# Altium PCB 智能笔 - 主控V2.PCBDOC
Units mil, origin at the board's own origin, x right, y up, seen from the top; angles counter-clockwise.
Board outline 2483.79 x 439.63 mil, 2 copper layers (TopLayer, BottomLayer); 34 components, 52 nets, 138 pads, 78 vias.
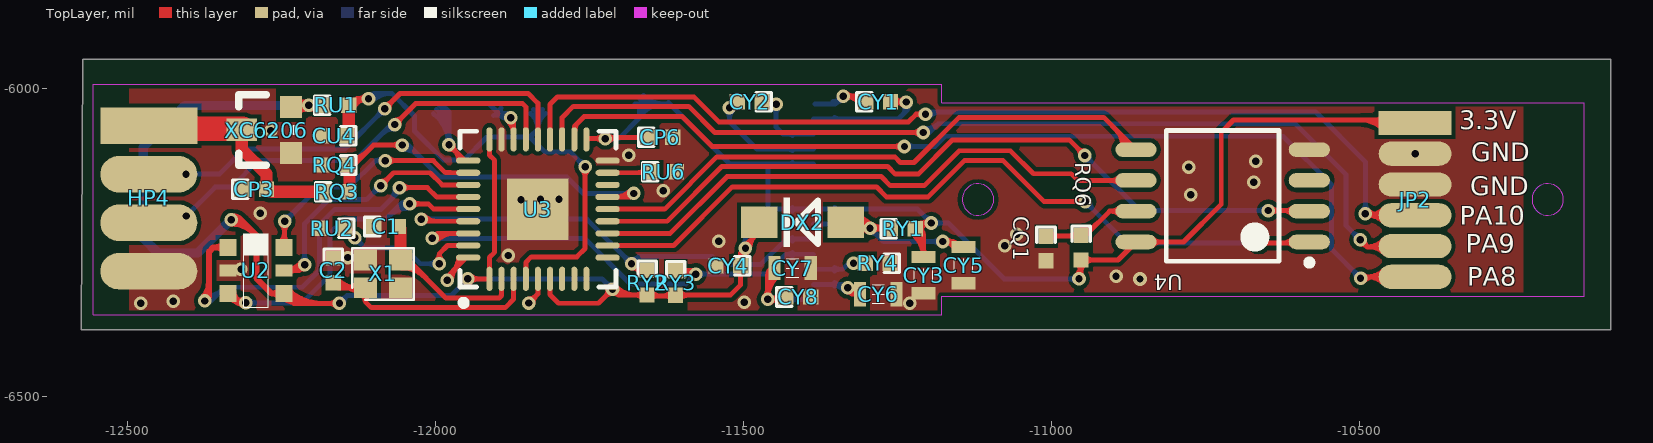
[diagram p0: TopLayer view]
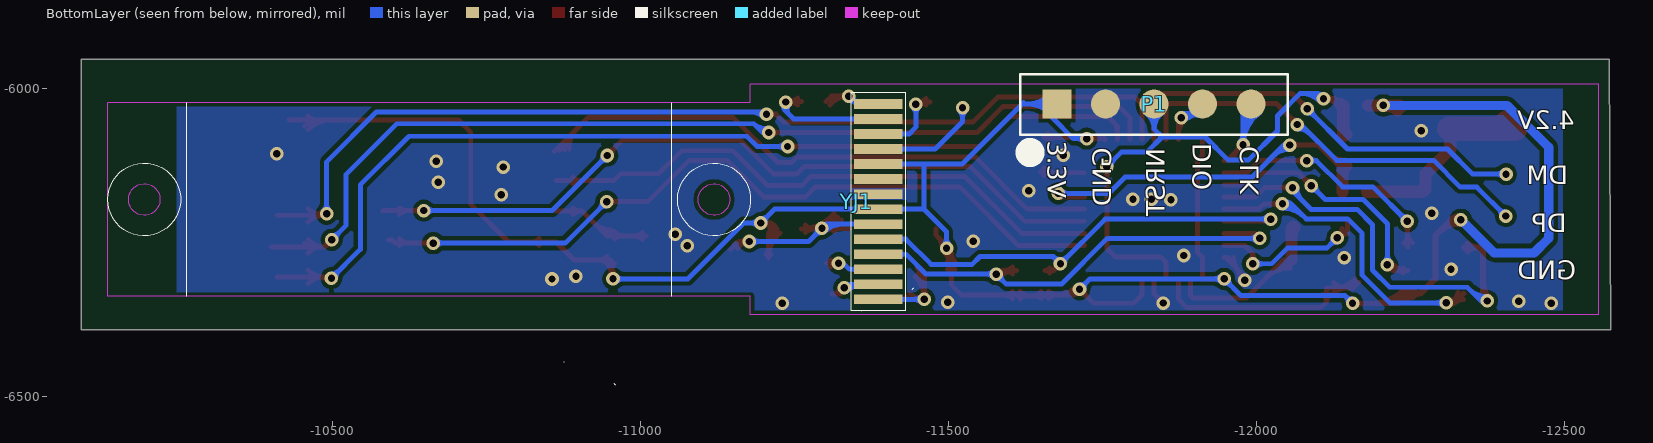
[diagram p1: BottomLayer view, seen from below]

## Layer stack, top to bottom
TopLayer: signal copper 1.4
Dielectric: core 12.6, FR-4, Dk 4.8
BottomLayer: signal copper 1.4

## Board outline
-12573,-5952.24 -10091.44,-5952.24 -10091.44,-6391.87 -12575.23,-6391.87

## Design rules (kind name [scope] priority, off if disabled: settings)
Clearance [All] p1: gap=7
ComponentClearance [All] p1 off: gap=10 collisioncheckmode=3
FanoutControl Fanout_LCC [All] p1 off: bgadir=Out bgaviamode=Centered fanoutstyle=Auto fanoutdirection=Alternating viagrid=1 // Protel DXP Scope 1 Expression Was: IsLCC   Fanout_LCC (Default Rule)
FanoutControl Fanout_BGA [All] p2 off: bgadir=Out bgaviamode=Centered fanoutstyle=Auto fanoutdirection=Alternating viagrid=1 // Protel DXP Scope 1 Expression Was: IsBGA   Fanout_BGA (Default Rule)
FanoutControl Fanout_SOIC [All] p3 off: bgadir=Out bgaviamode=Centered fanoutstyle=Auto fanoutdirection=Alternating viagrid=1 // Protel DXP Scope 1 Expression Was: IsSOIC   Fanout_SOIC (Default Rule)
FanoutControl Fanout_Default [All] p4: bgadir=Out bgaviamode=Centered fanoutstyle=Auto fanoutdirection=Alternating viagrid=1 // Fanout_Default (Default Rule)
FanoutControl Fanout_Small [All] p5 off: bgadir=Out bgaviamode=Centered fanoutstyle=Auto fanoutdirection=Alternating viagrid=1 // Protel DXP Scope 1 Expression Was: (CompPinCount < 5)   Fanout_Small (Default Rule)
PolygonConnect [All] p1: connectstyle=Direct reliefconductorwidth=10 reliefentries=4 polygonreliefangle="90 Angle"
RoutingVias [All] p1: holewidth=28 width=50 viastyle="Through Hole" minholewidth=28 minwidth=50 maxholewidth=28 maxwidth=50
SolderMaskExpansion [All] p1: expansion=4
TestPointUsage [All] p1: valid=0 allowmultiple=FALSE
Testpoint [(IsPad And (OnTopLayer Or OnBottomLayer))] p1: side=3 testpointundercomponent=TRUE minsize=40 maxsize=100 preferedsize=60 minholesize=20 maxholesize=40 preferedholesize=32 testpointgrid=1 style=297 order=-539222988
Width [All] p1: maxlimit=1111 minlimit=1 preferedwidth=10 toplayer_prefwidth=8 bottomlayer_prefwidth=8 minimp=50.000000 maximp=50.000000 favimp=50.000000
12 further rules are at their usual default settings.

## Components (designator, comment, footprint, x,y, rotation, side; value= is the part's Value field where it differs from the comment)
C1 "C_27P" 0402 -12100.01,-6223.82 r0 top
C2 "C_27P" 0402 -12166.21,-6275.06 r270 top
CP3 "105" 0402 -12314.47,-6163.3 r0 top
CP6 "104" 0402 -11654.9,-6079.12 r0 top
CQ1 "104" 0402 -11008.53,-6239.35 r270 top
CU4 "104" 0402 -12144.3,-6076.17 r180 top
CY1 "105" 0402 -11301.01,-6020.93 r0 top
CY2 "105" 0402 -11469.66,-6021.31 r180 top
CY3 "106" 0603-1 -11207.38,-6302.77 r270 top
CY4 "104" 0402 -11504.41,-6287.28 r180 top
CY5 "4.7UF" 0603-1 -11142.38,-6286.52 r90 top
CY6 "2.2UF" 0603-1 -11281.1,-6333.76 r0 top
CY7 "4.7UF" 0603-1 -11420.01,-6291.28 r0 top
CY8 "0.1UF" 0402 -11430.86,-6338.28 r0 top
DX2 "SS14" DIODE_SOP -11334.03,-6216.9 r180 top
HP4 "Header 4" "2.0 4P 焊盘" -12465.61,-6060.23 r0 top
JP2 "Header 6" "1.27MM  6H - 焊接" -10409.21,-6055.6 r270 top
P1 "Header 5" "2.0 1*5P" -11676.19,-6024.94 r180 bottom
RQ3 "10K" 0402 -12179.71,-6167.58 r0 top
RQ4 "10K" 0402 -12143.88,-6123.96 r180 top
RQ6 "10K" 0402 -10951.63,-6238.15 r270 top
RU1 "10K" 0402 -12181.01,-6027.22 r0 top
RU2 "10k" 0402 -12147.54,-6226.63 r180 top
RU6 "10k" 0402 -11648.9,-6134.82 r0 top
RY1 "4.7k" 0402 -11261.12,-6227.67 r0 top
RY2 "4.7k" 0402 -11656.42,-6295.11 r270 top
RY3 "4.7k" 0402 -11610.13,-6295.38 r270 top
RY4 "560k" 0402 -11261.87,-6283.54 r180 top
U2 "中文字库GT20L1616" SOT23-6 -12291.47,-6295.26 r270 top
U3 "STM32F103T8U6 QFN36" QFN36 -11833.63,-6195.62 r90 top
U4 "W25Q128" SST25VF016B -10721.68,-6173.98 r180 top
X1 "16M" "Crystal_SOP 2016" -12113.94,-6323.59 r0 top
XC6206 "XC6206P332MR (662K) 3.3V/0.5A 稳压芯片" SOT23-3-1 -12234.52,-6104.64 r90 top
YJ1 "0.86寸液晶屏" "0.86寸 oled 显示屏" -11386.06,-6183.45 r180 bottom locked

## Footprints (in the part's own frame and the unit in brackets; to place one, negate y for a bottom-side part, rotate by r counter-clockwise, add the part's x,y. Pads: shape width x height; smd on the part's side, far side on the other; paste and mask are expansions set on the pad)
"0.86寸 oled 显示屏" [mm]
  rect 2x0.4 smd: 1(0,4.03) 2(0,3.41) 3(0,2.79) 4(0,2.17) 5(0,1.55) 6(0,0.93) 7(0,0.31) 8(0,-0.31) 9(0,-0.93) 10(0,-1.55) 11(0,-2.17) 12(0,-2.79) 13(0,-3.41) 14(0,-4.03)
  round 1 on Bottom Overlay: 19(-1.774,3.963)
  silkscreen extent -1.12,-4.5 1.12,4.5
"1.27MM  6H - 焊接" [mm]
  rect 1x3 smd: 1(0,0)
  oval 1x3 smd: 2(1.27,0) 3(2.54,0) 4(3.81,0) 5(5.08,0) 6(6.35,0)
"2.0 1*5P" [mm]
  rect 1.2x1.2 smd: 1(0,0)
  round 1.2 smd: 2(2,0) 3(4,0) 4(6,0) 5(8,0)
  silkscreen extent -1.51,-2.1 9.51,1.22
"2.0 4P 焊盘" [mm]
  rect 4x1.5 smd: 1(0,0)
  oval 4x1.5 smd: 2(0,-2) 3(0,-4) 4(0,-6)
0402 [mil]
  rect 25x25 smd: 1(0,0) 2(40,0)
  silkscreen extent -15,-15 10,15
0603-1 [mm] "1.6mm*0.8mm*0.8mm"
  rect 0.5x1 smd: 1(-0.75,0) 2(0.75,0)
  silkscreen extent -0.25,-0.38 0.25,0.38
"Crystal_SOP 2016" [mm]
  rect 0.95x0.85 smd: 0(0,1.15) 0(1.45,0) 1(0,0) 2(1.45,1.15)
  silkscreen extent -0.54,-0.49 2,1.64
DIODE_SOP [mm]
  rect 1.5x1.3 smd: 1(0,0) 2(3.556,0)
  silkscreen extent 1.14,-1.02 2.56,1.02
QFN36 [mm]
  rect 2.54x2.54 smd: 0(0,0)
  oval 1x0.25 smd: 1(-2.875,2) 2(-2.875,1.5) 3(-2.875,1) 4(-2.875,0.5) 5(-2.875,0) 6(-2.875,-0.5) 7(-2.875,-1) 8(-2.875,-1.5) 9(-2.875,-2) 19(2.875,-2) 20(2.875,-1.5) 21(2.875,-1) 22(2.875,-0.5) 23(2.875,0) 24(2.875,0.5) 25(2.875,1) 26(2.875,1.5) 27(2.875,2)
  oval 0.25x1 smd: 10(-2,-2.875) 11(-1.5,-2.875) 12(-1,-2.875) 13(-0.5,-2.875) 14(0,-2.875) 15(0.5,-2.875) 16(1,-2.875) 17(1.5,-2.875) 18(2,-2.875) 28(2,2.875) 29(1.5,2.875) 30(1,2.875) 31(0.5,2.875) 32(0,2.875) 33(-0.5,2.875) 34(-1,2.875) 35(-1.5,2.875) 36(-2,2.875)
  silkscreen extent -3.99,-3.21 3.21,3.21
SOT23-3-1 [mil]
  rect 36x36 smd: 1(75,0) 2(0,0)
  rect 36x50 smd: 3(38,80)
  silkscreen extent -20,-5 95,85
SOT23-6 [mm] "MAX9041,3mm*3mm*1.5mm"
  rect 0.7x0.7 smd: 1(-0.95,-1.15) 3(0.95,-1.15) 4(0.95,1.15) 6(-0.95,1.15)
  rect 0.5x0.7 smd: 2(0,-1.15) 5(0,1.15)
  silkscreen extent -1.52,-0.51 1.52,0.51
SST25VF016B [mm] "SOIC, 8-Leads, Body 5.4x5.4mm (max), Pitch 1.27mm, IPC Medium Density"
  oval 1.7x0.6 smd: 1(-3.575,1.905) 2(-3.575,0.635) 3(-3.575,-0.635) 4(-3.575,-1.905) 5(3.575,-1.905) 6(3.575,-0.635) 7(3.575,0.635) 8(3.575,1.905)
  silkscreen extent -3.7,-2.7 2.33,2.88

## Part data
C1 C2 CP6 CU4 CY3 CY4 CY5 CY6 CY7 CY8: library part Cap, "Capacitor"
CP3 CY1 CY2: library part 104, "Capacitor"
CQ1: "Capacitor"
DX2: library part "Diode 1N4001", "1 Amp General Purpose Rectifier"
HP4: "Header, 4-Pin"
JP2: "Header, 6-Pin"
P1: "Header, 5-Pin"
RQ3 RQ4 RQ6 RU1 RU2 RU6 RY1 RY2 RY3 RY4: library part Res2, "Resistor"
U4: library part SST25VF016B
X1: library part XTAL_1, "Crystal Oscillator"

## Via types
v1: diameter 22, hole 12, TopLayer to BottomLayer, 78 vias

## Nets (pads, with @x,y where several pads share a name; then routed paths per layer and width w, separated by ;. In a path a pad name is that pad's centre, name@x,y a point inside that pad or via, vN(x,y) a via of type N, cw(c..) or ccw(c..) an arc to the next point about the centre after c; other vN are vias at no path point)
3.3V: CP6.1 CY3.1 CY4.1 DX2.2 JP2.1 P1.1 RQ6.2 RU1.1 RY1.2 RY2.2 RY3.2 U2.4 U3.1 U3.6 U3.19 U3.27 U4.8 XC6206.1 YJ1.5 YJ1.8 | length 5881.2
  TopLayer w8: U2.4@-12250.59,-6337.06 ccw(c-12222.62,-6309.1) -12222.62,-6348.65 ; U2.4 -12230.21,-6348.65 ; U2.4@-12245.89,-6342.44 cw(c-12245.22,-6363.66) -12230.21,-6348.65 ; U2.4@-12244.93,-6331.41 ccw(c-12203.31,-6289.78) -12203.31,-6348.65 ; U2.4@-12239.28,-6325.75 ccw(c-12183.99,-6270.47) -12183.99,-6348.65 ; U2.4@-12236.42,-6332.97 ccw(c-12215.2,-6333.64) -12230.21,-6348.65 ; v1@-12160.9,-6353.6 ccw(c-12172.85,-6365.55) -12172.85,-6348.65 ccw(c-12172.85,-6331.75) v1@-12160.9,-6343.7 ; v1(-12155.95,-6348.65) -12230.21,-6348.65 ; v1(-11947.42,-6308.8) U3.1 -11912.37,-6273.72 -11904.02,-6265.37 -11904.02,-6116.4 -11912.37,-6108.05 U3.27 ; v1@-11942.47,-6313.75 cw(c-11930.52,-6325.7) -11930.52,-6308.8 cw(c-11930.52,-6291.9) v1@-11942.47,-6303.85 ; U3.6 -11813.94,-6334.67 -11800.12,-6348.5 -11735.22,-6348.5 v1(-11712.52,-6325.81) -11703.22,-6335.11 ; U3.19 -11753.6,-6081.14 v1(-11724.13,-6081.14) -11722.12,-6079.12 CP6.1 ; U3.19@-11754.24,-6083.08 cw(c-11749.55,-6087.76) -11749.55,-6081.14 ; v1@-11729.08,-6086.09 ccw(c-11741.03,-6098.04) -11741.03,-6081.14 ccw(c-11741.03,-6064.24) v1@-11729.08,-6076.19 ; v1@-11719.52,-6325.81 cw(c-11736.42,-6325.81) -11724.47,-6337.75 cw(c-11712.52,-6349.7) v1@-11712.52,-6332.81 ; v1@-11719.18,-6086.09 cw(c-11702.38,-6102.89) -11702.38,-6079.12 ; v1@-11719.18,-6076.19 ccw(c-11712.09,-6069.09) -11712.09,-6079.12 ; v1@-11713.23,-6326.51 ccw(c-11692.47,-6305.75) -11692.47,-6335.11 ; v1@-11711.19,-6332.68 cw(c-11709.49,-6341.39) -11703.22,-6335.11 ; v1@-11707.57,-6320.86 ccw(c-11673.15,-6286.44) -11673.15,-6335.11 ; v1@-11705.65,-6327.14 ccw(c-11696.94,-6328.84) -11703.22,-6335.11 ; RY2.2@-11662.43,-6341.12 ccw(c-11676.94,-6355.63) -11676.94,-6335.11 ccw(c-11676.94,-6314.59) RY2.2@-11662.43,-6329.1 ; CP6.1@-11660.91,-6085.13 ccw(c-11675.42,-6099.64) -11675.42,-6079.12 ccw(c-11675.42,-6058.6) CP6.1@-11660.91,-6073.11 ; RY2.2@-11650.41,-6341.12 cw(c-11639.77,-6351.76) -11639.77,-6336.72 ; RY2.2@-11650.41,-6329.1 ccw(c-11632.03,-6310.72) -11632.03,-6336.72 ; -11633.88,-6336.72 ccw(c-11633.88,-6311.63) RY3.2@-11616.14,-6329.37 ; -11627.42,-6336.72 cw(c-11627.42,-6352.67) RY3.2@-11616.14,-6341.39 ; RY3.2@-11611.42,-6336.72 -11654.82,-6336.72 RY2.2 -11703.22,-6335.11 ; RY3.2 -11521.16,-6335.38 -11504.41,-6318.63 -11504.41,-6266.93 ; RY3.2@-11604.12,-6341.39 cw(c-11589.61,-6355.9) -11589.61,-6335.38 cw(c-11589.61,-6314.86) RY3.2@-11604.12,-6329.37 ; CY4.1@-11510.42,-6293.29 cw(c-11524.93,-6307.8) -11504.41,-6307.8 cw(c-11483.89,-6307.8) CY4.1@-11498.4,-6293.29 ; CY4.1@-11510.39,-6281.23 ccw(c-11524.51,-6266.93) -11504.41,-6266.93 ; CY4.1@-11504.41,-6294.84 cw(c-11460.93,-6294.84) v1@-11491.68,-6264.1 ; CY4.1@-11504.41,-6275.53 cw(c-11480.24,-6275.53) v1@-11497.33,-6258.44 ; v1@-11503.21,-6261.53 cw(c-11508.06,-6263.28) -11504.41,-6266.93 ; v1@-11499.01,-6265.73 ccw(c-11500.76,-6270.58) -11504.41,-6266.93 ; CY4.1@-11498.44,-6281.23 cw(c-11484.31,-6266.93) -11504.41,-6266.93 ; v1@-11489.63,-6259.15 cw(c-11462.04,-6259.15) DX2.2@-11481.55,-6239.64 ; DX2.2@-11479.33,-6227.45 -11479.33,-6237.43 -11496.63,-6254.72 v1(-11496.63,-6259.15) -11504.41,-6266.93 ; RY1.2@-11226.58,-6234.18 cw(c-11260.95,-6275.27) CY3.1@-11207.38,-6275.27 ; RY1.2@-11221.44,-6228.05 cw(c-11246.62,-6258.15) -11207.38,-6258.15 ; RY1.2@-11220.79,-6236.16 cw(c-11220.08,-6254.11) -11207.38,-6241.41 ; RY1.2@-11220.66,-6227.85 cw(c-11206.43,-6233.44) -11206.43,-6218.16 ; RY1.2@-11216.31,-6221.91 cw(c-11232.3,-6241.02) -11207.38,-6241.02 ; RY1.2@-11213.21,-6230.78 cw(c-11194.69,-6238.06) v1(-11194.69,-6218.16) RY1.2@-11211.61,-6218.16 ; RY1.2@-11212.63,-6228 ccw(c-11194.68,-6228.7) -11207.38,-6241.41 ; CY3.1@-11211.51,-6269.11 ccw(c-11221.48,-6259.14) -11207.38,-6259.14 ccw(c-11193.27,-6259.14) CY3.1@-11203.25,-6269.11 ; CY3.1 -11207.38,-6241.41 ; v1@-11199.64,-6223.11 ccw(c-11211.59,-6235.06) RY1.2@-11211.59,-6218.16 ; v1@-11199.64,-6213.21 cw(c-11211.59,-6201.26) RY1.2@-11211.59,-6218.16 ; v1@-10959.9,-6303.91 ccw(c-10979.85,-6283.96) RQ6.2@-10951.63,-6283.96 ; RQ6.2@-10957.65,-6284.16 cw(c-10972.16,-6298.67) -10951.63,-6298.67 cw(c-10931.11,-6298.67) -10945.62,-6284.16 cw(c-10931.11,-6298.67) -10931.11,-6278.15 cw(c-10931.11,-6257.63) RQ6.2@-10945.62,-6272.14 ; v1(-10954.95,-6308.86) -10951.63,-6305.55 RQ6.2 -10891.6,-6278.15 U4.8 -10785.18,-6248.98 -10724.01,-6187.81 -10724.01,-6070.86 -10704.03,-6050.88 -10429.59,-6050.88 JP2.1@-10429,-6050.29 ; U4.8@-10835.25,-6254.5 cw(c-10821.91,-6267.84) -10821.91,-6248.98 cw(c-10821.91,-6230.12) U4.8@-10835.25,-6243.45 ; -10497.85,-6050.88 cw(c-10497.85,-6104.86) JP2.1@-10459.67,-6066.69 ; -10478.53,-6050.88 cw(c-10478.53,-6085.55) JP2.1@-10454.02,-6061.04 ; -10475.05,-6050.88 ccw(c-10475.05,-6029.13) JP2.1@-10459.67,-6044.51 ; RY1.2@-11211.61,-6218.16 RY1.2 -11207.38,-6241.41
  TopLayer w10: v1@-12333.94,-6209.56 cw(c-12327.06,-6221.48) -12317.33,-6211.75 ; v1@-12331.94,-6219.02 cw(c-12331.94,-6271.86) -12294.58,-6234.5 ; v1(-12331.94,-6213.02) -12316.05,-6213.02 -12290.71,-6238.36 -12290.71,-6307.64 -12265.69,-6332.67 ; v1@-12331.94,-6209.02 cw(c-12331.94,-6237.71) -12311.65,-6217.42 ; v1@-12328.94,-6218.22 cw(c-12320.31,-6233.17) -12308.11,-6220.96 ; v1@-12327.69,-6217.26 cw(c-12317.45,-6227.51) -12317.45,-6213.02 cw(c-12317.45,-6198.54) v1@-12327.69,-6208.78 ; U2.4@-12252.76,-6338.49 ccw(c-12265.69,-6349.93) -12265.69,-6332.67 ; U2.4@-12252.76,-6326.85 cw(c-12265.69,-6315.4) -12265.69,-6332.67 ; U2.4 -12265.69,-6332.67
  TopLayer w20: U2.4 U2.4@-12245.85,-6332.33 ; XC6206.1 -12232.1,-6027.22 RU1.1 ; XC6206.1@-12228.87,-6035.3 cw(c-12209.36,-6054.8) v1@-12209.36,-6027.22
  BottomLayer w8: v1(-12155.95,-6348.65) -12143.42,-6336.12 -11974.74,-6336.12 v1(-11947.42,-6308.8) -11729.52,-6308.8 v1(-11712.52,-6325.81) ; v1@-12155.95,-6341.65 ccw(c-12155.95,-6324.75) -12144,-6336.7 ccw(c-12132.05,-6348.65) v1@-12148.95,-6348.65 ; v1@-11954.42,-6308.8 cw(c-11971.32,-6308.8) -11959.37,-6320.75 cw(c-11947.42,-6332.7) v1@-11947.42,-6315.8 ; v1@-11942.47,-6313.75 cw(c-11930.52,-6325.7) -11930.52,-6308.8 cw(c-11930.52,-6291.9) v1@-11942.47,-6303.85 ; v1(-11724.13,-6081.14) -11702.6,-6081.14 -11668.67,-6047.2 P1.1@-11668.67,-6024.94 ; v1@-11719.52,-6325.81 ccw(c-11736.42,-6325.81) -11724.47,-6313.86 ccw(c-11712.52,-6301.91) v1@-11712.52,-6318.81 ; v1@-11719.18,-6086.09 cw(c-11707.23,-6098.04) -11707.23,-6081.14 cw(c-11707.23,-6064.24) v1@-11719.18,-6076.19 ; P1.1 -11623.78,-6024.94 -11621.6,-6022.75 -11521.93,-6122.42 YJ1.5 ; P1.1@-11667.97,-6033.15 cw(c-11648.13,-6052.99) -11648.13,-6024.94 cw(c-11648.13,-5996.88) P1.1@-11667.97,-6016.72 ; P1.1@-11662.31,-6038.81 cw(c-11628.81,-6072.31) -11628.81,-6024.94 cw(c-11628.81,-5977.56) P1.1@-11662.31,-6011.06 ; v1@-11501.58,-6254.2 ccw(c-11513.53,-6242.25) -11496.63,-6242.25 ccw(c-11479.73,-6242.25) v1@-11491.68,-6254.2 ; v1(-11496.63,-6259.15) -11496.63,-6232.2 -11460.08,-6195.65 ; -11460.2,-6122.42 -11460.08,-6139.83 -11460.08,-6195.65 ; YJ1.8@-11420.29,-6198.39 ccw(c-11426.91,-6205) -11426.91,-6195.65 ccw(c-11426.91,-6186.3) YJ1.8@-11420.29,-6192.91 ; YJ1.5@-11420.29,-6125.16 ccw(c-11426.91,-6131.78) -11426.91,-6122.42 ccw(c-11426.91,-6113.07) YJ1.5@-11420.29,-6119.68 ; YJ1.8@-11351.82,-6198.39 cw(c-11345.21,-6205) -11345.21,-6195.65 cw(c-11345.21,-6186.3) YJ1.8@-11351.82,-6192.91 ; v1@-11201.69,-6218.16 ccw(c-11218.59,-6218.16) -11206.64,-6206.21 ccw(c-11194.69,-6194.26) v1@-11194.69,-6211.16 ; v1@-11189.74,-6223.11 cw(c-11177.79,-6235.06) -11177.79,-6218.16 cw(c-11177.79,-6201.26) v1@-11189.74,-6213.21 ; v1@-10959.9,-6313.81 ccw(c-10971.85,-6325.76) -10971.85,-6308.86 ccw(c-10971.85,-6291.96) v1@-10959.9,-6303.91 ; v1(-10954.95,-6308.86) -11076.69,-6308.86 -11167.39,-6218.16 v1(-11194.69,-6218.16) -11217.2,-6195.65 -11460.08,-6195.65
  BottomLayer w15: v1(-12331.94,-6213.02) -12385.89,-6266.98 -12450.54,-6266.98 -12474.58,-6242.94 -12474.58,-6094.96 -12406.84,-6027.22 v1(-12205.88,-6027.22)
ADC1: U3.7
ADC2: RQ3.2 RQ4.1 U3.15 | length 823.2
  TopLayer w8: RQ4.1 -12132.86,-6123.96 -12100.46,-6091.56 v1(-12053.68,-6091.56) ; RQ4.1@-12143.88,-6123.46 ccw(c-12143.88,-6095.66) -12124.22,-6115.32 ; RQ4.1@-12143.88,-6115.46 ccw(c-12143.88,-6068.35) -12110.56,-6101.66 ; v1@-12058.63,-6096.51 ccw(c-12070.58,-6108.46) -12070.58,-6091.56 ccw(c-12070.58,-6074.66) v1@-12058.63,-6086.61 ; U3.15 -11683.89,-6175.93 v1(-11678.12,-6170.16) v1@-11678.9,-6175.93 ; U3.15@-11708.95,-6175.93 ccw(c-11708.95,-6139.34) v1@-11683.07,-6165.21 ; -11689.64,-6175.93 ccw(c-11689.64,-6158.65) v1@-11677.42,-6170.87
  TopLayer w20: RQ4.1@-12145.64,-6125.73 cw(c-12159.97,-6140.05) -12139.71,-6140.05 ; RQ4.1 -12139.71,-6128.13 RQ3.2
  BottomLayer w8: v1@-12053.68,-6098.56 cw(c-12053.68,-6137.17) -12026.38,-6109.87 ; v1(-12053.68,-6091.56) -12044.69,-6091.56 -11992.59,-6143.65 -11786.44,-6143.65 -11759.93,-6170.16 v1(-11678.12,-6170.16) ; v1@-12053.68,-6090.56 cw(c-12053.68,-6109.86) -12040.03,-6096.21 ; v1@-11683.07,-6175.11 ccw(c-11695.02,-6187.06) -11695.02,-6170.16 ccw(c-11695.02,-6153.26) v1@-11683.07,-6165.21
BOOT0: RU2.1 U3.35 | length 387.1
  TopLayer w8: RU2.1@-12147.54,-6235.13 cw(c-12147.54,-6247.68) RU2.1@-12138.66,-6238.8 ; RU2.1@-12147.54,-6217.03 -12147.54,-6229.93 v1@-12128.98,-6248.49 ; RU2.1@-12145.43,-6232.04 ccw(c-12136.65,-6223.26) v1@-12133.24,-6235.2 ; RU2.1@-12139.04,-6226.63 ccw(c-12110.54,-6226.63) v1@-12130.69,-6246.78 ; v1@-11998.63,-6279.33 ccw(c-12009.54,-6267.96) -11993.78,-6267.96 ; v1(-11993.78,-6284.38) -11993.78,-6267.96 ; v1@-11988.94,-6279.33 cw(c-11978.03,-6267.96) -11993.78,-6267.96 ; U3.35 -11980.5,-6254.67 -11993.78,-6267.96
  BottomLayer w8: v1@-12131.32,-6248.93 cw(c-12131.32,-6265.83) -12119.37,-6253.88 cw(c-12107.42,-6241.93) v1@-12124.32,-6241.93 ; v1(-12131.32,-6241.93) -12114.73,-6258.52 -12050.44,-6258.52 -12024.58,-6284.38 v1(-11993.78,-6284.38) ; v1@-11998.73,-6289.33 ccw(c-12010.68,-6301.28) -12010.68,-6284.38 ccw(c-12010.68,-6267.48) v1@-11998.73,-6279.43
GND: C1.1 C2.1 CP3.1 CP6.2 CQ1.2 CU4.2 CY3.2 CY4.2 CY5.1 CY6.2 CY7.2 CY8.2 HP4.4 JP2.2 JP2.3 P1.2 RQ4.2 RU2.2 RU6.2 RY4.1 U2.2 U3.0 U3.5 U3.18 U3.26 U3.36 U4.4 X1.0 XC6206.2 YJ1.7 | length 181.2
  TopLayer w8: v1(-11980.72,-6310.91) -11980.72,-6305.22 -11949.86,-6274.36 U3.36 ; v1@-11973.72,-6310.91 cw(c-11943.08,-6310.91) -11964.74,-6289.24 ; -11971.44,-6295.94 ccw(c-11993.03,-6274.36) U3.36@-11962.5,-6274.36 ; -11957.79,-6282.29 ccw(c-11965.72,-6274.36) U3.36@-11954.5,-6274.36 ; v1(-11848.39,-6348.14) -11833.63,-6333.39 U3.5 ; v1@-11848.39,-6341.14 ccw(c-11848.39,-6324.24) -11836.44,-6336.19 ccw(c-11824.49,-6348.14) v1@-11841.39,-6348.14
  other v1: -12478.65,-6348.45 -11229.65,-6348.17 -11498.86,-6347.07 -12425.81,-6344.95 -10855.88,-6309.12 -10894.82,-6304.7 -12315.91,-6292.96 -12142.54,-6274.25 -11881.57,-6270.94 -11075.43,-6254.93 -11539.73,-6247.88 -11056.17,-6236.47 -12284.78,-6202.35 -11861.04,-6180.34 -11829.47,-6179.85 -11799.36,-6179.37 -10773.2,-6172.25 -11629.92,-6166.08 -10671.25,-6151.78 -10776.81,-6127.29 -10667.64,-6118.06 -11686.38,-6108.17 -10409.21,-6105.6 -12267.52,-6068.29
I2C1_SCL: RY2.1 U3.33 YJ1.10 | length 956.7
  TopLayer w8: v1(-12022.97,-6211.77) -12019.44,-6215.3 U3.33 ; v1@-12018.02,-6206.82 ccw(c-11997.54,-6186.33) -11997.54,-6215.3 ; v1(-11681.61,-6284.22) -11670.72,-6295.11 ; v1@-11681.14,-6291.2 cw(c-11680.24,-6304.63) -11670.72,-6295.11 cw(c-11661.2,-6285.59) v1@-11674.63,-6284.69 ; RY2.1@-11663.89,-6299.17 ccw(c-11670.72,-6302.88) -11670.72,-6295.11 ; RY2.1@-11663.89,-6291.05 cw(c-11670.72,-6287.34) -11670.72,-6295.11 ; RY2.1 -11670.72,-6295.11
  BottomLayer w8: v1(-12022.97,-6211.77) -11754.06,-6211.77 v1(-11681.61,-6284.22) -11670.03,-6272.63 ; v1@-12018.02,-6216.72 cw(c-12006.07,-6228.67) -12006.07,-6211.77 cw(c-12006.07,-6194.87) v1@-12018.02,-6206.82 ; v1@-11688.61,-6284.22 ccw(c-11705.51,-6284.22) -11693.56,-6272.27 ccw(c-11681.61,-6260.32) v1@-11681.61,-6277.22 ; v1@-11681.46,-6277.22 ccw(c-11681.11,-6261.54) -11670.03,-6272.63 ; v1@-11674.62,-6284.06 cw(c-11658.94,-6283.71) -11670.03,-6272.63 ; YJ1.10@-11420.29,-6247.21 ccw(c-11426.91,-6253.82) -11426.91,-6244.47 ccw(c-11426.91,-6235.12) YJ1.10@-11420.29,-6241.73 ; YJ1.10 -11430.65,-6244.47 -11471.54,-6285.36 -11538.2,-6285.36 -11550.93,-6272.63 -11670.03,-6272.63
I2C1_SDA: RY3.1 U3.34 YJ1.11 | length 1004.1
  TopLayer w8: v1@-12005.8,-6242.44 cw(c-11987.81,-6260.43) -11987.81,-6234.99 ; v1(-12005.09,-6243.15) -11996.93,-6234.99 ; v1@-12002.99,-6236.47 ccw(c-12001.19,-6230.73) -11996.93,-6234.99 ; v1@-12000.15,-6248.1 cw(c-11968.49,-6279.75) -11968.49,-6234.99 ; v1@-11998.42,-6241.04 cw(c-11992.68,-6239.24) -11996.93,-6234.99 ; U3.34 -11996.93,-6234.99 ; RY3.1 -11582.97,-6295.38 v1(-11577.19,-6301.16) ; RY3.1@-11608.05,-6295.38 cw(c-11608.05,-6332.03) v1@-11582.14,-6306.11 ; RY3.1@-11604.12,-6301.39 cw(c-11589.61,-6315.9) -11589.61,-6295.38 cw(c-11589.61,-6274.86) RY3.1@-11604.12,-6289.37 ; -11588.74,-6295.38 cw(c-11588.74,-6312.71) v1@-11576.48,-6300.45
  BottomLayer w8: v1(-12005.09,-6243.15) -11757.57,-6243.15 -11683.36,-6317.36 -11593.39,-6317.36 v1(-11577.19,-6301.16) -11463.18,-6301.16 -11430.9,-6268.88 YJ1.11 ; v1@-12000.15,-6248.1 cw(c-11988.2,-6260.05) -11988.2,-6243.15 cw(c-11988.2,-6226.25) v1@-12000.15,-6238.2 ; v1@-11584.19,-6301.16 cw(c-11601.09,-6301.16) -11589.14,-6313.11 cw(c-11577.19,-6325.06) v1@-11577.19,-6308.16 ; v1@-11572.24,-6306.11 cw(c-11560.29,-6318.06) -11560.29,-6301.16 cw(c-11560.29,-6284.26) v1@-11572.24,-6296.21 ; YJ1.11@-11420.29,-6271.62 ccw(c-11426.91,-6278.23) -11426.91,-6268.88 ccw(c-11426.91,-6259.53) YJ1.11@-11420.29,-6266.14
NetCQ1_1: CQ1.1 RQ6.1 U4.7 | length 301.9
  TopLayer w8: CQ1.1 -10945.48,-6239.35 -10905.11,-6198.98 U4.7 ; CQ1.1@-11002.52,-6245.36 cw(c-10988.01,-6259.87) -10988.01,-6239.35 cw(c-10988.01,-6218.83) CQ1.1@-11002.52,-6233.34 ; -10975.04,-6239.35 ccw(c-10975.04,-6214.74) RQ6.1@-10957.65,-6232.14 ; -10969.27,-6239.35 cw(c-10969.27,-6255.79) RQ6.1@-10957.65,-6244.16 ; RQ6.1@-10951.63,-6237.65 ccw(c-10951.63,-6218.7) -10938.23,-6232.1 ; RQ6.1@-10951.63,-6229.65 ccw(c-10951.63,-6191.39) -10924.58,-6218.44 ; U4.7@-10889.6,-6204.5 ccw(c-10902.93,-6217.84) -10902.93,-6198.98 ccw(c-10902.93,-6180.12) U4.7@-10889.6,-6193.45
NetCY1_1: CY1.1 YJ1.1 | length 216.7
  TopLayer w8: v1@-11332.89,-6016.99 cw(c-11320.94,-6028.94) -11320.94,-6012.04 cw(c-11320.94,-5995.14) v1@-11332.89,-6007.09 ; -11320.9,-6012.04 cw(c-11320.9,-6037.3) CY1.1@-11301.39,-6021.25 ; CY1.1@-11307.57,-6026.33 ccw(c-11337.84,-6051.24) -11337.84,-6012.04 -11309.9,-6012.04 CY1.1
  BottomLayer w8: YJ1.1@-11383.77,-6025.02 -11350.82,-6025.02 v1(-11337.84,-6012.04) ; YJ1.1@-11354.56,-6020.91 ccw(c-11354.56,-6001.97) v1@-11341.17,-6015.36 ; v1@-11344.84,-6012.04 cw(c-11361.74,-6012.04) -11349.79,-6023.99 cw(c-11337.84,-6035.94) v1@-11337.84,-6019.04
NetCY1_2: CY1.2 YJ1.2 | length 324.6
  TopLayer w8: CY1.2 -11236.4,-6020.93 v1(-11235.61,-6021.72) ; CY1.2@-11255,-6026.94 cw(c-11240.49,-6041.45) -11240.49,-6020.93 cw(c-11240.49,-6000.41) CY1.2@-11255,-6014.92 ; CY1.2@-11254.41,-6020.93 cw(c-11254.41,-6040.52) v1@-11240.56,-6026.67 ; CY1.2@-11250.6,-6020.93 ccw(c-11250.6,-6006.72) v1@-11240.56,-6016.77
  BottomLayer w8: YJ1.2 -11248.29,-6049.2 -11235.61,-6036.51 ; YJ1.2@-11351.82,-6051.93 cw(c-11345.21,-6058.55) -11345.21,-6049.2 cw(c-11345.21,-6039.84) YJ1.2@-11351.82,-6046.46 ; -11240.89,-6041.8 ccw(c-11248.63,-6034.06) v1@-11240.69,-6026.53 ; v1@-11240.05,-6027.13 cw(c-11247.74,-6036.51) -11235.61,-6036.51 ; v1(-11235.61,-6021.72) -11235.61,-6036.51 ; -11235.08,-6035.99 ccw(c-11242.66,-6028.41) v1@-11234.88,-6021.03 ; v1@-11231.17,-6027.13 ccw(c-11223.48,-6036.51) -11235.61,-6036.51
NetCY2_1: CY2.1 YJ1.3 | length 216.9
  TopLayer w8: CY2.1@-11463.31,-6026.96 cw(c-11450.71,-6038.18) v1@-11450.71,-6021.31 ; CY2.1@-11463.31,-6015.66 ccw(c-11450.71,-6004.44) v1@-11450.71,-6021.31 ; v1@-11452.24,-6029.62 ccw(c-11469.66,-6043.71) CY2.1 v1@-11450.71,-6021.31 ; v1(-11446.8,-6025.22) v1@-11450.71,-6021.31
  BottomLayer w8: v1@-11451.75,-6030.17 cw(c-11463.7,-6042.12) -11446.8,-6042.12 cw(c-11429.9,-6042.12) v1@-11441.85,-6030.17 ; v1(-11446.8,-6025.22) -11446.8,-6062.71 -11435.9,-6073.6 YJ1.3 ; YJ1.3@-11420.29,-6076.34 ccw(c-11426.91,-6082.96) -11426.91,-6073.6 ccw(c-11426.91,-6064.25) YJ1.3@-11420.29,-6070.87
NetCY2_2: CY2.2 YJ1.4 | length 218.5
  BottomLayer w8: v1@-11527.55,-6036.14 cw(c-11539.5,-6048.09) -11522.6,-6048.09 cw(c-11505.7,-6048.09) v1@-11517.65,-6036.14 ; v1(-11522.6,-6031.19) -11522.6,-6053.44 -11478.02,-6098.01 YJ1.4 ; YJ1.4@-11420.29,-6100.75 ccw(c-11426.91,-6107.37) -11426.91,-6098.01 ccw(c-11426.91,-6088.66) YJ1.4@-11420.29,-6095.27
NetCY5_2: CY5.2 DX2.1 RY1.1 YJ1.9 | length 755.3
  TopLayer w8: DX2.1@-11339.33,-6227.45 RY1.1@-11261.34,-6227.45 ; DX2.1@-11325.81,-6213.32 ccw(c-11295.58,-6188.04) v1@-11295.58,-6227.45 ; DX2.1@-11319.67,-6208.18 ccw(c-11278.46,-6173.73) -11278.46,-6227.45 ; DX2.1@-11314.83,-6232.17 cw(c-11303.42,-6243.57) v1@-11303.42,-6227.45 ; DX2.1@-11313.53,-6203.05 ccw(c-11261.34,-6159.42) RY1.1@-11261.34,-6227.45 ; DX2.1@-11312.82,-6227.45 ccw(c-11312.82,-6208.23) v1@-11299.23,-6221.82 ; DX2.1@-11309.55,-6227.45 cw(c-11309.55,-6242.03) v1@-11299.23,-6231.72 ; v1@-11289.34,-6231.72 cw(c-11279.02,-6242.03) -11279.02,-6227.45 ; v1@-11289.34,-6221.82 ccw(c-11275.75,-6208.23) -11275.75,-6227.45 ; -11282.17,-6227.45 cw(c-11282.17,-6248.72) RY1.1@-11267.13,-6233.68 ; -11281.11,-6227.45 ccw(c-11281.11,-6207.68) RY1.1@-11267.13,-6221.65 ; RY1.1 RY1.1@-11261.34,-6227.45 ; v1@-11171.41,-6253.13 cw(c-11159.46,-6265.08) -11159.46,-6248.19 cw(c-11159.46,-6231.29) v1@-11171.41,-6243.24 ; -11163.18,-6248.19 cw(c-11163.18,-6262.69) CY5.2@-11150.31,-6256 ; CY5.2@-11157.41,-6259.69 ccw(c-11176.35,-6269.53) v1(-11176.35,-6248.19) -11159.25,-6248.19 CY5.2@-11145.94,-6261.49
  BottomLayer w8: YJ1.9 -11300.99,-6220.06 -11272.87,-6248.19 v1(-11176.35,-6248.19) ; YJ1.9@-11351.82,-6222.8 cw(c-11345.21,-6229.41) -11345.21,-6220.06 cw(c-11345.21,-6210.71) YJ1.9@-11351.82,-6217.32 ; -11327.38,-6220.06 cw(c-11327.38,-6259.86) v1@-11299.23,-6231.72 ; -11308.06,-6220.06 cw(c-11308.06,-6240.55) v1@-11293.58,-6226.06 ; v1@-11294.28,-6233.77 cw(c-11294.28,-6250.67) -11282.34,-6238.72 cw(c-11270.39,-6226.77) v1@-11287.28,-6226.77 ; v1@-11181.3,-6253.13 ccw(c-11193.25,-6265.08) -11193.25,-6248.19 ccw(c-11193.25,-6231.29) v1@-11181.3,-6243.24
  other v1: -11294.28,-6226.77
NetCY6_1: CY6.1 YJ1.13 | length 195.5
  TopLayer w8: v1@-11331.45,-6323.47 ccw(c-11319.74,-6321.95) CY6.1@-11319.74,-6333.76 ; v1(-11330.46,-6323.34) CY6.1@-11320.04,-6333.76 ; v1@-11329.75,-6330.31 cw(c-11328.53,-6342.24) CY6.1@-11320.04,-6333.76 ; v1@-11323.52,-6322.44 ccw(c-11310.63,-6320.76) CY6.1 CY6.1@-11320.04,-6333.76 ; v1@-11323.5,-6324.06 ccw(c-11311.56,-6325.28) CY6.1@-11320.04,-6333.76
  BottomLayer w8: YJ1.13 -11336.1,-6317.7 v1(-11330.46,-6323.34) ; YJ1.13@-11360.98,-6317.7 cw(c-11360.98,-6353.87) v1@-11335.41,-6328.29 ; YJ1.13@-11351.82,-6320.44 cw(c-11345.21,-6327.05) -11345.21,-6317.7 cw(c-11345.21,-6308.35) YJ1.13@-11351.82,-6314.96 ; -11341.67,-6317.7 cw(c-11341.67,-6334.56) v1@-11329.75,-6322.64
NetCY7_1: CY7.1 CY8.1 YJ1.14 | length 357.4
  TopLayer w8: v1@-11465.44,-6337.16 ccw(c-11477.39,-6325.21) -11460.49,-6325.21 ccw(c-11443.59,-6325.21) -11455.54,-6337.16 ccw(c-11443.59,-6325.21) -11443.59,-6342.11 ccw(c-11443.59,-6359.01) v1@-11455.54,-6347.06 ; v1@-11460.49,-6341.66 cw(c-11409,-6341.66) CY7.1@-11445.41,-6305.25 ; -11460.49,-6322.35 cw(c-11428.31,-6322.35) CY7.1@-11451.07,-6299.59 ; -11460.49,-6303.04 cw(c-11447.63,-6303.04) CY7.1@-11456.73,-6293.94 ; CY7.1 -11460.49,-6302.23 v1(-11460.49,-6342.11) ; CY8.1@-11436.89,-6332.29 cw(c-11460.49,-6308.83) v1(-11460.49,-6342.11) ; CY8.1 -11434.69,-6342.11 v1(-11460.49,-6342.11)
  BottomLayer w8: v1(-11460.49,-6342.11) YJ1.14 ; v1@-11455.54,-6347.06 cw(c-11443.59,-6359.01) -11443.59,-6342.11 cw(c-11443.59,-6325.21) v1@-11455.54,-6337.16 ; YJ1.14@-11420.29,-6344.85 ccw(c-11426.91,-6351.46) -11426.91,-6342.11 ccw(c-11426.91,-6332.76) YJ1.14@-11420.29,-6339.37
NetD81_1: 
NetD81_2: 
NetD91_2: 
NetDUT1_1: 
NetDUT1_2: 
NetDV3_1: 
NetRU3_1: 
NetRU4_1: 
NetRU5_1: 
NetRU6_1: RU6.1 U3.17 | length 104.5
  TopLayer w8: U3.17 -11650.64,-6136.56 RU6.1 ; -11673.63,-6136.56 ccw(c-11673.63,-6110.09) RU6.1@-11654.91,-6128.81 ; -11665.21,-6136.56 cw(c-11665.21,-6151.13) RU6.1@-11654.91,-6140.83
NetRY4_2: RY4.2 YJ1.12 | length 158.8
  TopLayer w8: v1@-11316.24,-6288.49 cw(c-11304.29,-6300.44) -11304.29,-6283.54 cw(c-11304.29,-6266.64) v1@-11316.24,-6278.59 ; RY4.2@-11308.14,-6289.28 ccw(c-11321.19,-6301.24) v1(-11321.19,-6283.54) ; RY4.2@-11308.14,-6277.8 cw(c-11321.19,-6265.84) v1(-11321.19,-6283.54) ; RY4.2 v1(-11321.19,-6283.54)
  BottomLayer w8: YJ1.12 -11338.88,-6293.29 -11329.13,-6283.54 v1(-11321.19,-6283.54) ; YJ1.12@-11351.82,-6296.03 cw(c-11345.21,-6302.64) -11345.21,-6293.29 cw(c-11345.21,-6283.94) YJ1.12@-11351.82,-6290.55
NetRZ1_1: 
NetRZ3_2: 
NRST: CU4.1 P1.3 RU1.2 U3.4 | length 1195.2
  TopLayer w8: RU1.2@-12140.57,-6027.45 cw(c-12122.05,-6037.23) -12122.05,-6016.29 ; RU1.2@-12138.93,-6027.75 -12127.47,-6016.29 ; RU1.2@-12138.57,-6019.08 ccw(c-12135.36,-6008.4) -12127.47,-6016.29 ; RU1.2@-12133.5,-6031.19 cw(c-12108.78,-6044.24) v1(-12108.78,-6016.29) -12127.47,-6016.29 ; RU1.2@-12132.51,-6027.22 cw(c-12118.28,-6027.22) -12128.35,-6017.16 ; v1@-12113.73,-6021.23 ccw(c-12125.68,-6033.18) -12125.68,-6016.28 ccw(c-12125.68,-5999.39) v1@-12113.73,-6011.34 ; U3.4 -11853.31,-6282.2 -11844.18,-6273.07 -11770.47,-6273.07 -11756.97,-6259.57 v1(-11756.97,-6126.75) ; v1@-11761.92,-6131.7 cw(c-11773.87,-6143.65) -11756.97,-6143.65 cw(c-11740.07,-6143.65) v1@-11752.02,-6131.7
  TopLayer w20: CU4.1@-12146.07,-6074.4 ccw(c-12158.28,-6062.19) -12141.01,-6062.19 ; CU4.1 -12141.01,-6072.88 RU1.2
  BottomLayer w8: v1@-12109.48,-6015.58 cw(c-12090.09,-6034.96) -12090.09,-6007.54 ; v1(-12108.78,-6016.29) -12100.03,-6007.54 ; v1@-12107.08,-6009.49 ccw(c-12105.28,-6002.29) -12100.03,-6007.54 ; v1@-12103.83,-6021.23 cw(c-12070.78,-6054.25) -12070.78,-6007.54 ; v1@-12101.99,-6014.59 cw(c-12094.78,-6012.79) -12100.03,-6007.54 ; P1.3@-11845.89,-6040.28 cw(c-11866.1,-6065.65) -11833.67,-6065.65 ; P1.3@-11840.91,-6034.03 cw(c-11852.87,-6049.05) -11833.67,-6049.05 cw(c-11814.46,-6049.05) P1.3@-11826.43,-6034.03 ; P1.3 -11833.67,-6065.65 ; P1.3@-11821.44,-6040.28 ccw(c-11801.24,-6065.65) -11833.67,-6065.65 ; v1@-11763.97,-6126.75 ccw(c-11780.87,-6126.75) -11768.92,-6114.8 ccw(c-11756.97,-6102.85) v1@-11756.97,-6119.75 ; v1(-11756.97,-6126.75) -11780.62,-6103.1 -11821.73,-6103.1 -11846.42,-6078.41 ; -12100.03,-6007.54 -12070.78,-6007.54 ; -12070.78,-6007.54 -12033.99,-6044.33 -12033.99,-6068.77 -11986.64,-6116.12 -11954.13,-6116.12 -11916.41,-6078.41 -11846.42,-6078.41 ; -11846.42,-6078.41 -11833.67,-6065.65
OSC_IN: C1.2 U3.2 X1.2 | length 359.2
  TopLayer w8: X1.2 -12044.72,-6278.32 -11983.1,-6339.94 -11896.66,-6339.94 -11892.68,-6335.96 U3.2 ; X1.2@-12054.88,-6291.05 cw(c-12054.88,-6346.32) -12015.8,-6307.24 ; X1.2@-12054.88,-6283.05 cw(c-12054.88,-6319) -12029.46,-6293.58
  TopLayer w20: C1.2@-12061.77,-6225.58 cw(c-12073.66,-6237.47) -12056.85,-6237.47 ; C1.2 -12056.85,-6226.97 X1.2
OSC_OUT: C2.2 U3.3 X1.1 | length 500.2
  TopLayer w8: C2.2 -12157.68,-6323.59 X1.1 -12113.94,-6345.94 ; C2.2@-12165.86,-6314.71 ccw(c-12144.41,-6293.26) -12144.41,-6323.59 ; C2.2@-12160.2,-6309.05 ccw(c-12125.1,-6273.94) X1.1@-12125.1,-6323.59 ; X1.1@-12124.91,-6332.6 ccw(c-12146.64,-6354.33) -12146.64,-6323.59 ccw(c-12146.64,-6292.86) X1.1@-12124.91,-6314.59 ; X1.1@-12120.43,-6334.55 cw(c-12127.17,-6345.94) -12113.94,-6345.94 ; X1.1@-12107.45,-6334.55 ccw(c-12100.7,-6345.94) -12113.94,-6345.94 ; U3.3 -11873,-6341.66 -11886.91,-6355.57 -12104.31,-6355.57 -12113.94,-6345.94
PA8: JP2.6 U3.20 | length 1757.2
  TopLayer w8: U3.20 -11774.57,-6061.35 -11758.49,-6045.27 -11599.28,-6045.27 -11550.61,-6093.94 v1(-11238.41,-6093.94) ; U3.20@-11773.65,-6067.66 cw(c-11756.2,-6067.66) -11768.54,-6055.32 ; v1@-11243.36,-6098.89 ccw(c-11255.31,-6110.84) -11255.31,-6093.94 ccw(c-11255.31,-6077.04) v1@-11243.36,-6088.99 ; v1(-10497.77,-6307.71) -10495.66,-6305.6 JP2.6 ; v1@-10492.83,-6312.66 cw(c-10475.78,-6329.71) -10475.78,-6305.6 ; v1@-10492.83,-6302.76 ccw(c-10485.97,-6295.91) -10485.97,-6305.6 ; JP2.6@-10459.67,-6316.69 ccw(c-10486.45,-6343.47) -10486.45,-6305.6 ccw(c-10486.45,-6267.74) JP2.6@-10459.67,-6294.51
  BottomLayer w8: v1(-11238.41,-6093.94) -11189.04,-6093.94 -11172.34,-6077.24 -10623.61,-6077.24 -10544.57,-6156.27 -10544.57,-6260.91 v1(-10497.77,-6307.71) ; v1@-11233.46,-6098.89 cw(c-11221.51,-6110.84) -11221.51,-6093.94 cw(c-11221.51,-6077.04) v1@-11233.46,-6088.99 ; v1@-10504.77,-6307.71 ccw(c-10521.67,-6307.71) -10509.72,-6295.76 ccw(c-10497.77,-6283.81) v1@-10497.77,-6300.71
PA9: JP2.5 U3.21 | length 1781.9
  TopLayer w8: U3.21 -11794.26,-6046.87 -11776.1,-6028.71 -11588.93,-6028.71 -11546.49,-6071.16 v1(-11208.03,-6071.16) ; v1@-11212.98,-6076.11 ccw(c-11224.93,-6088.06) -11224.93,-6071.16 ccw(c-11224.93,-6054.26) v1@-11212.98,-6066.21 ; v1(-10498.22,-6245.46) -10486.66,-6257.01 ; v1@-10498.05,-6252.46 cw(c-10497.67,-6268.02) -10486.66,-6257.01 ; v1@-10491.22,-6245.63 ccw(c-10475.66,-6246) -10486.66,-6257.01 ; -10483.05,-6257.01 cw(c-10483.05,-6290.06) JP2.5@-10459.67,-6266.69 ; -10468.84,-6257.01 ccw(c-10468.84,-6237.59) JP2.5@-10454.33,-6250.5 ; JP2.5@-10460.3,-6245.18 cw(c-10486.66,-6221.74) -10486.66,-6257.01 ; JP2.5@-10400.69,-6257.01 -10486.66,-6257.01
  BottomLayer w8: v1@-11208.2,-6072.14 ccw(c-11205.59,-6056.99) -11194.72,-6067.86 ; v1(-11208.03,-6071.16) -11198.02,-6071.16 -11183.79,-6056.93 ; v1@-11206.84,-6064.26 ccw(c-11202.39,-6038.34) -11183.79,-6056.93 ; v1@-10505.22,-6245.46 ccw(c-10522.12,-6245.46) -10510.17,-6233.51 ccw(c-10498.22,-6221.56) v1@-10498.22,-6238.46 ; v1(-10498.22,-6245.46) -10521.17,-6222.5 -10521.17,-6139.5 -10603.74,-6056.93 -11183.79,-6056.93
PA10: JP2.4 U3.22 | length 1765.9
  TopLayer w8: U3.22 -11813.94,-6025.42 -11801.82,-6013.3 -11580.38,-6013.3 -11539.86,-6053.82 -11231.77,-6053.82 -11219.42,-6041.47 ; v1@-11209.55,-6046.01 ccw(c-11219.42,-6054.44) -11219.42,-6041.47 ; v1@-11209.55,-6036.92 cw(c-11219.42,-6028.49) -11219.42,-6041.47 ; v1(-11204.23,-6041.47) -11219.42,-6041.47 ; v1(-10489.83,-6203.07) -10487.3,-6205.6 JP2.4 ; v1@-10484.88,-6208.02 cw(c-10479.03,-6213.87) -10479.03,-6205.6 ; v1@-10484.88,-6198.12 ccw(c-10466.82,-6180.07) JP2.4@-10466.82,-6205.6 ; JP2.4@-10459.67,-6216.69 ccw(c-10486.45,-6243.47) -10486.45,-6205.6 ccw(c-10486.45,-6167.74) JP2.4@-10459.67,-6194.51
  BottomLayer w8: v1(-11204.23,-6041.47) -11195.19,-6037.95 -10570.62,-6037.95 -10489.83,-6118.75 v1(-10489.83,-6203.07) ; v1@-11199.28,-6046.42 cw(c-11178.84,-6066.86) -11178.84,-6037.95 ; v1@-10494.78,-6198.12 ccw(c-10506.73,-6186.17) -10489.83,-6186.17 ccw(c-10472.93,-6186.17) v1@-10484.88,-6198.12
SPI1-NSS: U2.3 U3.32 | length 816.2
  TopLayer w8: U2.3 -12321.64,-6347.77 ; U2.3@-12336.03,-6342.42 cw(c-12334.67,-6360.8) -12321.64,-6347.77 ; U2.3@-12334.98,-6332.42 ccw(c-12317.35,-6329.97) v1@-12317.35,-6347.77 ; U2.3@-12330.01,-6339.4 ccw(c-12319.35,-6328.75) v1@-12311.71,-6341.74 ; U2.3@-12327.06,-6331.32 ccw(c-12308.17,-6328.7) v1(-12308.16,-6347.77) -12321.64,-6347.77 ; U2.3@-12326.99,-6333.38 ccw(c-12308.61,-6334.73) -12321.64,-6347.77 ; -12322.69,-6346.71 ccw(c-12313.94,-6337.96) v1@-12307.66,-6348.63 ; v1@-12313.89,-6351.79 ccw(c-12321.64,-6357.24) -12321.64,-6347.77 ; v1@-12313.89,-6343.74 cw(c-12321.64,-6338.3) -12321.64,-6347.77 ; v1(-12042.13,-6186.97) -12011.65,-6186.97 -12003,-6195.62 U3.32 ; v1@-12037.18,-6191.92 cw(c-12025.23,-6203.87) -12025.23,-6186.97 cw(c-12025.23,-6170.07) v1@-12037.18,-6182.02
  BottomLayer w8: v1(-12308.16,-6347.77) -12216.5,-6347.77 -12171.5,-6302.77 -12171.5,-6234.92 -12147.98,-6211.4 -12080.51,-6211.4 -12056.08,-6186.97 ; v1@-12303.22,-6352.72 cw(c-12291.27,-6364.67) -12291.27,-6347.77 cw(c-12291.27,-6330.87) v1@-12303.22,-6342.82 ; -12077.89,-6208.78 cw(c-12042.13,-6244.53) v1@-12042.13,-6193.97 ; -12064.23,-6195.12 cw(c-12042.13,-6217.22) v1@-12042.13,-6185.97 ; -12063.05,-6193.94 cw(c-12053.88,-6203.11) v1@-12046.25,-6192.63 ; -12056.43,-6187.32 cw(c-12048.31,-6195.45) v1@-12041.54,-6186.16 ; v1@-12047.75,-6191.15 ccw(c-12056.08,-6197.36) -12056.08,-6186.97 ; v1@-12047.75,-6182.79 cw(c-12056.08,-6176.58) -12056.08,-6186.97 ; v1(-12042.13,-6186.97) -12056.08,-6186.97
SPI1-SCK: U2.1 U3.31 | length 833.5
  TopLayer w8: v1(-12058.42,-6160.73) -12013.07,-6160.73 -11997.87,-6175.93 U3.31 ; v1@-12053.47,-6165.68 cw(c-12041.52,-6177.63) -12041.52,-6160.73 cw(c-12041.52,-6143.83) v1@-12053.47,-6155.78
  TopLayer w10: v1@-12378.7,-6340.53 ccw(c-12405.18,-6314.05) -12367.72,-6314.05 ; v1(-12374.45,-6344.78) -12367.72,-6338.05 -12367.72,-6264.78 -12360.81,-6257.86 U2.1 ; U2.1@-12342.95,-6264.07 ccw(c-12357.94,-6279.06) -12357.94,-6257.86 ccw(c-12357.94,-6236.67) U2.1@-12342.95,-6251.65
  BottomLayer w8: v1@-12374.45,-6345.78 ccw(c-12374.45,-6324.72) -12359.57,-6339.61 ; v1(-12374.45,-6344.78) -12364.73,-6344.78 -12342.39,-6322.44 -12216.05,-6322.44 -12188.39,-6294.77 -12188.39,-6221.04 -12163.33,-6195.99 -12088.55,-6195.99 -12058.42,-6165.86 v1(-12058.42,-6160.73) ; v1@-12374.45,-6337.78 ccw(c-12374.45,-6297.41) -12345.91,-6325.95 ; -12073.99,-6181.43 ccw(c-12094.69,-6160.73) v1@-12065.42,-6160.73
SPI1-SI: U2.6 U3.29 | length 530.8
  TopLayer w8: U2.6@-12253.11,-6250.95 ccw(c-12272.48,-6231.57) -12245.08,-6231.57 ; v1@-12250.03,-6220.57 cw(c-12261.98,-6232.52) -12245.08,-6232.52 cw(c-12228.18,-6232.52) v1@-12240.13,-6220.57 ; U2.6 -12245.08,-6256.75 v1(-12245.08,-6215.62) ; -12245.08,-6236.93 ccw(c-12225.26,-6236.93) U2.6@-12239.28,-6250.95 ; v1(-12081.36,-6116.9) -12003.44,-6116.9 -11983.97,-6136.37 -11975.42,-6136.37 -11975.22,-6136.56 U3.29 ; v1@-12076.41,-6121.84 cw(c-12064.46,-6133.79) -12064.46,-6116.9 cw(c-12064.46,-6100) v1@-12076.41,-6111.95
  BottomLayer w8: v1(-12245.08,-6215.62) -12188.99,-6159.53 -12139.84,-6159.53 -12097.21,-6116.9 ; v1@-12245.08,-6208.62 ccw(c-12245.08,-6191.72) -12233.13,-6203.67 ccw(c-12221.18,-6215.62) v1@-12238.08,-6215.62 ; v1@-12086.53,-6121.61 ccw(c-12097.21,-6131.34) -12097.21,-6116.9 ; v1@-12086.53,-6112.18 cw(c-12097.21,-6102.45) -12097.21,-6116.9 ; v1(-12081.36,-6116.9) -12097.21,-6116.9
SPI1-SO: U2.5 U3.30 | length 583.3
  TopLayer w8: U2.5@-12238.12,-6299.4 cw(c-12228.15,-6309.37) -12228.15,-6295.26 cw(c-12228.15,-6281.16) U2.5@-12238.12,-6291.13 ; -12229.48,-6295.26 ccw(c-12229.48,-6272.59) v1@-12211.82,-6286.81 ; v1@-12219.44,-6287.66 cw(c-12227.53,-6289.41) -12221.67,-6295.26 ; v1@-12218.05,-6281.79 cw(c-12246.19,-6259.13) U2.5 -12221.67,-6295.26 ; v1@-12214.07,-6293.03 ccw(c-12215.82,-6301.12) -12221.67,-6295.26 ; v1(-12212.59,-6286.18) -12221.67,-6295.26 ; v1(-12089.18,-6157.42) -12089.04,-6157.42 -12068.12,-6136.5 -12008.84,-6136.5 -11989.1,-6156.24 U3.30 ; v1@-12089.18,-6150.42 ccw(c-12089.18,-6133.18) -12076.99,-6145.37 ; v1@-12082.18,-6157.42 cw(c-12065.61,-6157.42) -12077.33,-6145.7
  BottomLayer w8: v1@-12217.54,-6281.23 ccw(c-12229.49,-6269.28) -12212.59,-6269.28 ccw(c-12195.7,-6269.28) v1@-12207.65,-6281.23 ; v1(-12212.59,-6286.18) -12212.59,-6219.37 -12173.25,-6180.03 -12111.79,-6180.03 v1(-12089.18,-6157.42) ; v1@-12096.18,-6157.42 cw(c-12113.08,-6157.42) -12101.13,-6169.36 cw(c-12089.18,-6181.31) v1@-12089.18,-6164.41
SPI1_MISO: U3.13 U4.2 | length 1388.2
  TopLayer w8: U3.13 -11623.86,-6215.3 -11534.95,-6126.39 -11265.62,-6126.39 -11253.25,-6138.76 -11215.93,-6138.76 -11160.37,-6083.2 -10970.99,-6083.2 v1(-10945.63,-6108.56) ; v1@-10952.63,-6108.56 ccw(c-10969.53,-6108.56) -10957.58,-6096.61 ccw(c-10945.63,-6084.66) v1@-10945.63,-6101.56 ; v1(-10647.71,-6197.9) -10582.01,-6197.9 U4.2 ; v1@-10642.76,-6202.85 cw(c-10630.81,-6214.8) -10630.81,-6197.9 cw(c-10630.81,-6181) v1@-10642.76,-6192.95 ; -10624.04,-6197.9 cw(c-10624.04,-6220.44) U4.2@-10608.1,-6204.5 ; -10618.84,-6197.9 ccw(c-10618.84,-6182.72) U4.2@-10608.1,-6193.45
  BottomLayer w8: v1@-10945.63,-6115.56 cw(c-10945.63,-6132.46) -10933.68,-6120.51 cw(c-10921.73,-6108.56) v1@-10938.63,-6108.56 ; v1(-10945.63,-6108.56) -10856.3,-6197.9 v1(-10647.71,-6197.9) ; v1@-10652.66,-6202.85 ccw(c-10664.61,-6214.8) -10664.61,-6197.9 ccw(c-10664.61,-6181) v1@-10652.66,-6192.95
SPI1_MOSI: U3.14 U4.5 | length 1032.1
  TopLayer w8: U3.14 -11627.73,-6195.62 -11542.97,-6110.86 -11254.09,-6110.86 -11245.12,-6119.83 -11222.87,-6119.83 -11149.68,-6046.65 -10914.76,-6046.65 -10889.47,-6071.93 ; -10896.36,-6065.04 U4.5 ; -10895.45,-6065.96 cw(c-10923.96,-6094.47) U4.5@-10883.89,-6099 ; -10883.7,-6077.7 cw(c-10902.86,-6096.86) U4.5@-10875.94,-6099.9 ; U4.5@-10871.96,-6089.44 cw(c-10881.76,-6099.24) U4.5@-10867.99,-6100.8 ; U4.5@-10860.22,-6101.18 cw(c-10860.66,-6101.62) U4.5@-10860.04,-6101.69
SPI1_NSS: U3.11 U4.1 | length 1393.7
  TopLayer w8: U3.11 -11613.18,-6254.67 -11518.04,-6159.53 -11283.84,-6159.53 -11267.75,-6175.63 -11199.9,-6175.63 -11141.14,-6116.86 -11078.09,-6116.86 -11011.55,-6183.4 v1(-10944.54,-6183.4) ; v1@-10949.49,-6188.35 ccw(c-10961.44,-6200.3) -10961.44,-6183.4 ccw(c-10961.44,-6166.5) v1@-10949.49,-6178.45 ; v1(-10663.04,-6250.81) -10601.37,-6250.81 -10596.63,-6246.07 U4.1@-10590.43,-6246.07 ; v1@-10658.09,-6255.76 cw(c-10646.14,-6267.71) -10646.14,-6250.81 cw(c-10646.14,-6233.91) v1@-10658.09,-6245.86 ; -10625.86,-6250.81 ccw(c-10625.86,-6225.7) U4.1@-10608.1,-6243.45 ; -10617.02,-6250.81 cw(c-10617.02,-6263.42) U4.1@-10608.1,-6254.5
  BottomLayer w8: v1@-10944.54,-6190.4 cw(c-10944.54,-6207.3) -10932.59,-6195.35 cw(c-10920.64,-6183.4) v1@-10937.54,-6183.4 ; v1(-10944.54,-6183.4) -10877.13,-6250.81 v1(-10663.04,-6250.81) ; v1@-10667.99,-6255.76 ccw(c-10679.94,-6267.71) -10679.94,-6250.81 ccw(c-10679.94,-6233.91) v1@-10667.99,-6245.86
SPI1_SCK: U3.12 U4.6 | length 975.4
  TopLayer w8: U3.12 -11618.69,-6234.99 -11526.32,-6142.62 -11276.03,-6142.62 -11261.19,-6157.46 -11206.31,-6157.46 -11149.68,-6100.83 -11066.34,-6100.83 -11028.95,-6138.23 -10967.78,-6138.23 -10957.03,-6148.98 U4.6 ; U4.6@-10889.6,-6154.5 ccw(c-10902.93,-6167.84) -10902.93,-6148.98 ccw(c-10902.93,-6130.12) U4.6@-10889.6,-6143.45
SWCLK: P1.5 U3.28 | length 334.3
  TopLayer w8: v1@-11978.11,-6097.9 cw(c-11978.11,-6114.8) -11966.17,-6102.85 cw(c-11954.22,-6090.9) v1@-11971.11,-6090.9 ; v1(-11978.11,-6090.9) -11952.14,-6116.87 U3.28 ; -11969.83,-6099.19 cw(c-11987.52,-6116.87) U3.28@-11962.5,-6116.87 ; U3.28@-11956.17,-6112.84 cw(c-11960.2,-6116.87) U3.28@-11954.5,-6116.87
  BottomLayer w8: P1.5@-12003.28,-6040.36 cw(c-12044.04,-6092.17) v1@-11978.11,-6092.17 ; P1.5@-11998.33,-6034.07 cw(c-12031.08,-6075.7) -11978.12,-6075.7 ; P1.5@-11993.39,-6027.78 cw(c-12018.12,-6059.23) -11978.12,-6059.23 ; P1.5 -11978.11,-6037.97 v1(-11978.11,-6090.9) ; v1@-11983.06,-6085.95 ccw(c-11995.01,-6074) -11978.11,-6074 ccw(c-11961.22,-6074) v1@-11973.17,-6085.95
SWDIO: P1.4 U3.25 | length 205.8
  TopLayer w8: v1@-11882.63,-6052.06 cw(c-11905.9,-6075.32) U3.25@-11873,-6075.32 ; v1(-11877.68,-6047.11) -11873,-6051.79 U3.25
  BottomLayer w8: P1.4 -11890.23,-6047.11 ; P1.4@-11906.13,-6031.21 ccw(c-11883.57,-6008.66) v1@-11878.74,-6040.19 ; P1.4@-11905.99,-6043.48 cw(c-11901.01,-6057.88) -11890.24,-6047.1 ; -11894.96,-6042.38 ccw(c-11880.61,-6028.03) v1@-11877.53,-6048.09 ; P1.4@-11893.86,-6031.35 ccw(c-11879.46,-6036.33) -11890.24,-6047.1 ; v1@-11883.64,-6050.78 ccw(c-11890.23,-6054.86) -11890.23,-6047.11 ; v1@-11883.64,-6043.43 cw(c-11890.23,-6039.36) -11890.23,-6047.11 ; v1(-11877.68,-6047.11) -11890.23,-6047.11
USART2_RX: U3.10
USART2_TX: U3.9
USBDM: HP4.2 U3.23 | length 770.9
  TopLayer w8: v1(-12082.33,-6032.58) -12057.55,-6007.8 -11849.36,-6007.8 -11833.63,-6023.54 U3.23 ; v1@-12082.33,-6025.58 ccw(c-12082.33,-6008.68) -12070.38,-6020.63 ccw(c-12058.43,-6032.58) v1@-12075.33,-6032.58
  BottomLayer w8: v1(-12405.21,-6138.72) -12350.93,-6138.72 -12310.22,-6098.01 -12147.76,-6098.01 v1(-12082.33,-6032.58) ; v1@-12400.26,-6143.67 cw(c-12388.31,-6155.62) -12388.31,-6138.72 cw(c-12388.31,-6121.82) v1@-12400.26,-6133.77 ; v1@-12089.33,-6032.58 cw(c-12106.23,-6032.58) -12094.28,-6044.53 cw(c-12082.33,-6056.48) v1@-12082.33,-6039.58
USBDP: HP4.3 U3.24 | length 759.4
  TopLayer w8: v1(-12066.41,-6058.23) -12032.38,-6024.2 -11858.49,-6024.2 -11853.31,-6029.38 U3.24 ; v1@-12066.41,-6051.23 ccw(c-12066.41,-6034.33) -12054.46,-6046.28 ccw(c-12042.51,-6058.23) v1@-12059.41,-6058.23
  BottomLayer w8: v1(-12404.91,-6206.87) -12357.87,-6159.83 -12331.03,-6159.83 -12287.6,-6116.4 -12130.19,-6116.4 -12072.02,-6058.23 v1(-12066.41,-6058.23) ; v1@-12404.91,-6199.87 ccw(c-12404.91,-6182.97) -12392.96,-6194.92 ccw(c-12381.01,-6206.87) v1@-12397.91,-6206.87 ; -12087.93,-6074.14 cw(c-12066.41,-6095.66) v1@-12066.41,-6065.23
VCC3.3-1: 
VCC+4.2V: CP3.2 HP4.1 RQ3.1 XC6206.3 | length 395.4
  TopLayer w20: XC6206.3@-12320.18,-6072.3 cw(c-12333.84,-6085.95) -12314.52,-6085.95 cw(c-12295.21,-6085.95) XC6206.3@-12308.87,-6072.3 ; XC6206.3 -12314.52,-6098.35 -12274.47,-6138.4 CP3.2 -12270.19,-6167.58 RQ3.1 ; CP3.2@-12272.71,-6161.53 ccw(c-12258.09,-6146.92) -12258.09,-6167.58
  TopLayer w40: HP4.1@-12420.14,-6065.38 XC6206.3@-12312.99,-6065.38 ; HP4.1@-12409.66,-6053.5 ccw(c-12380.97,-6024.81) -12380.97,-6065.38
XuotgID: 
XuotgVBUS: 
pads on no net: U3.8 U3.16 U4.3 YJ1.6 YJ1.19

## Polygon pours and split planes (outlines as drawn)
GND on TopLayer (solid, remove dead copper): -12497.44,-5967.53 -12497.44,-6379.97 -10233.37,-6379.97 -10233.37,-5964.65
GND on BottomLayer (solid, remove dead copper): -12497.44,-5947.34 -12497.44,-6385.74 -10246.35,-6385.74 -10246.35,-5960.32

## Keep-outs
KeepOutLayer:
  circle w0.13: c-10193.75,-6179.96 r25.59
  circle w0.13: c-11118.95,-6179.96 r25.59
  lines w0.13: -11050.05,-6337.44 -10262.65,-6337.44 ; -11050.05,-6022.48 -10262.65,-6022.48 ; -12555.95,-6366.96 -11178,-6366.96 -11178,-6337.44 -10134.69,-6337.44 -10134.69,-6022.48 -11178,-6022.48 -11178,-5992.95 -12555.95,-5992.95 -12555.95,-6366.96

## Silkscreen, mask and mechanical layers (free items; w line width, h text height)
TopOverlay:
  text "3.3V" at -10337.82,-6066.1 h30
  text "GND" at -10318,-6118.02 h30
  text "GND" at -10319.22,-6173.06 h30
  text "PA10" at -10336.35,-6221.38 h30
  text "PA9" at -10326.91,-6266.82 h30
  text "PA8" at -10324.22,-6319.97 h30
BottomOverlay:
  circle w0.13: c-10193.75,-6179.96 r59.06
  circle w0.13: c-11118.95,-6179.96 r59.06
  lines w0.13: -11442.79,-6324.06 -11440.23,-6326.62 ; -11359.08,-6361.13 -11358.65,-6361.56 ; -11050.05,-6337.44 -11050.05,-6022.48 ; -10959.25,-6481.6 -10956.69,-6479.04 ; -10875.55,-6444.53 -10875.12,-6444.1 ; -10262.65,-6337.44 -10262.65,-6022.48
  text "4.2V" at -12516.64,-6065.55 h30
  text "3.3V" at -11661.14,-6084.69 h30 r90
  text "DIO" at -11926.77,-6088.77 h30 r270
  text "CLK" at -12003.63,-6093.86 h30 r270
  text "GND" at -11763.89,-6095.7 h30 r270
  text "NRST" at -11850.73,-6096.92 h30 r270
  text "DM" at -12506.06,-6155.09 h30
  text "DP" at -12503.86,-6233.18 h30
  text "GND" at -12519.09,-6309.12 h30